# Altium PCB ssd-pcb.PcbDoc
Units mil, origin at the board's own origin, x right, y up, seen from the top; angles counter-clockwise.
Board outline 2510 x 1830 mil, 2 copper layers (Top Layer, Bottom Layer); 8 components, 17 nets, 69 pads, 44 vias.
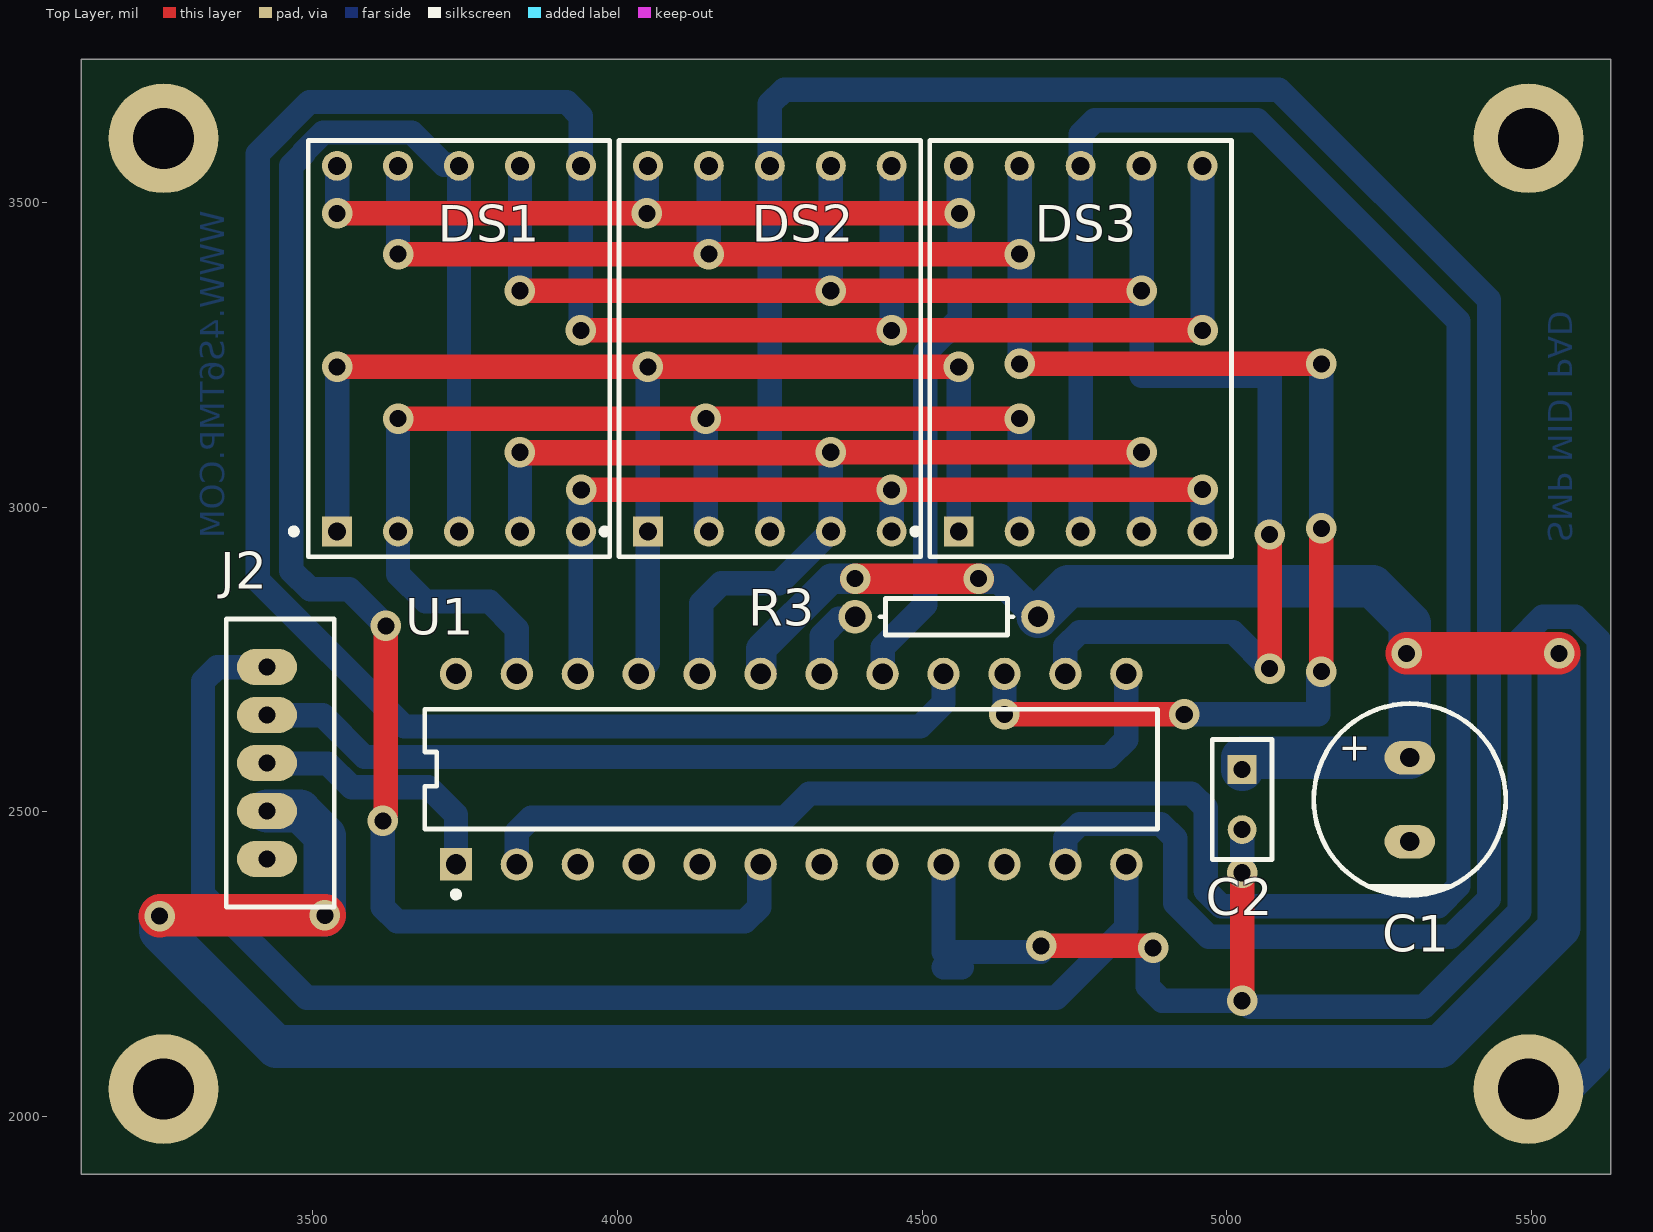
[diagram p0: Top Layer view]
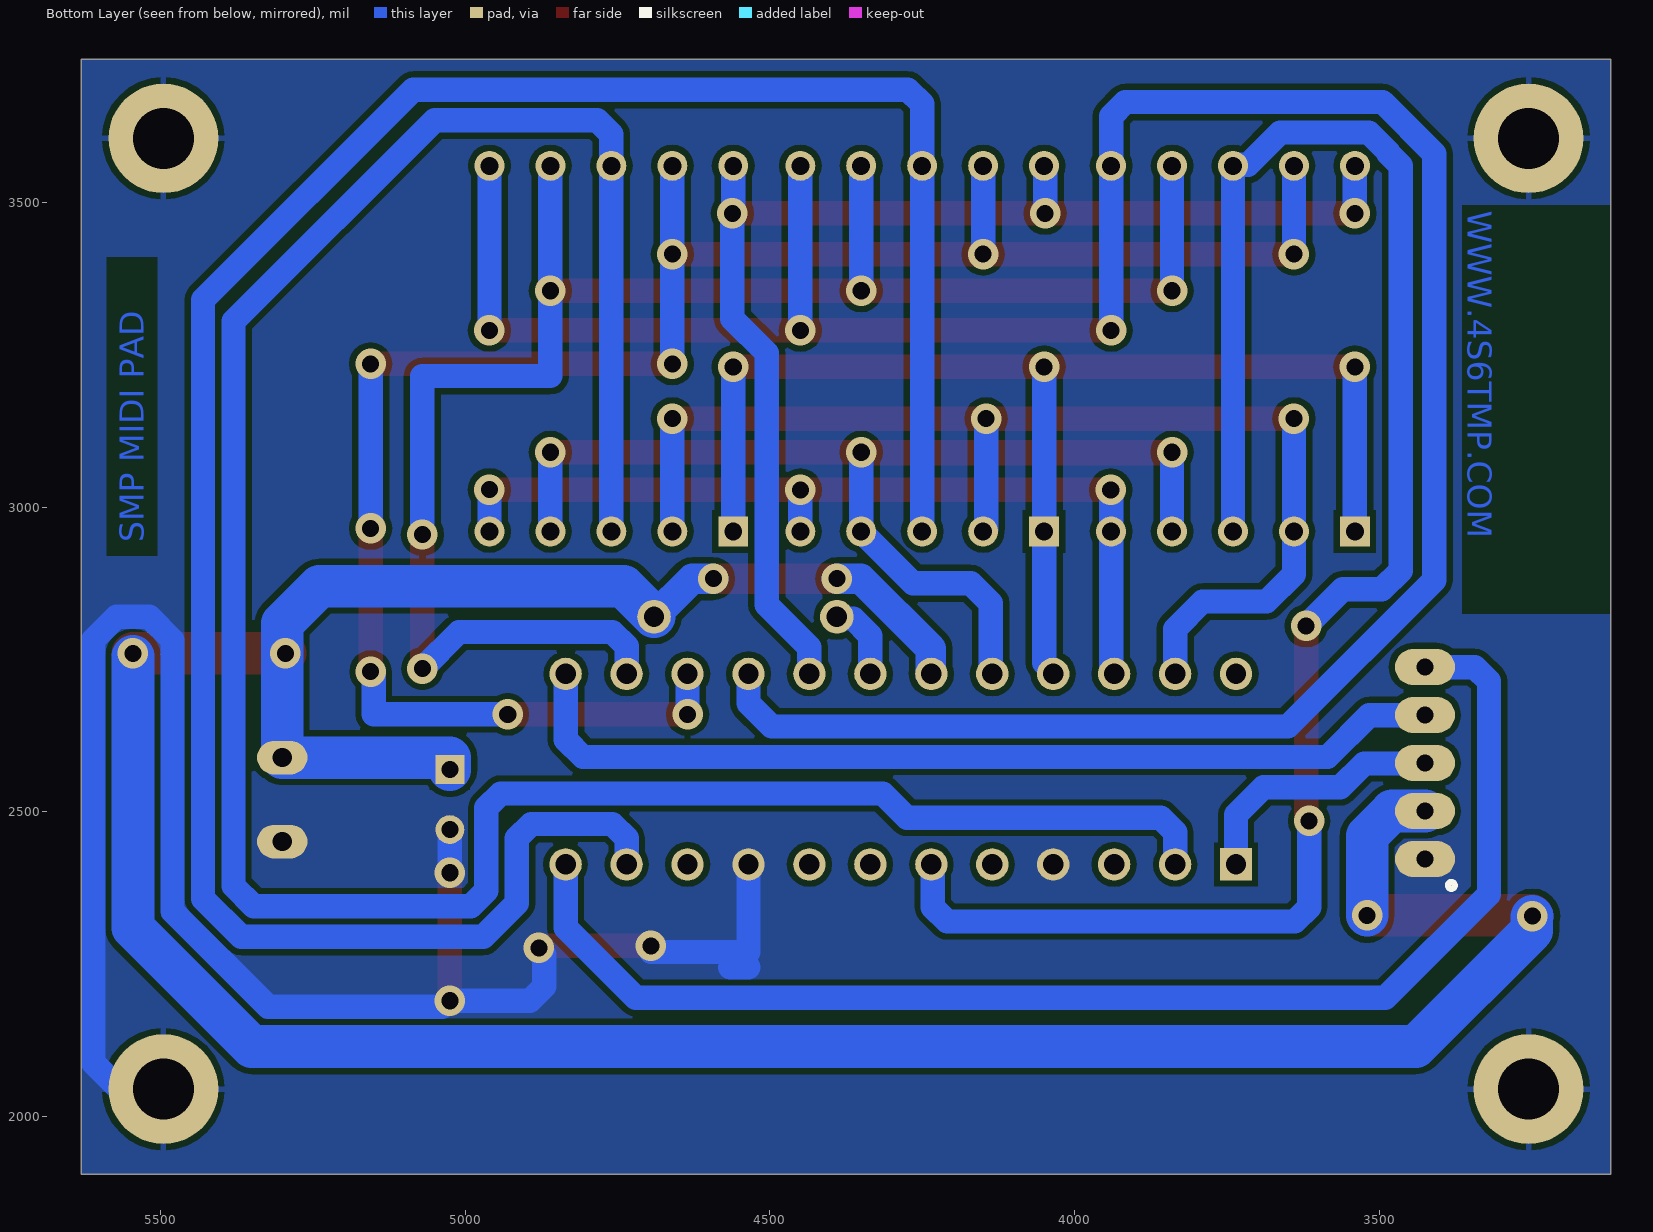
[diagram p1: Bottom Layer view, seen from below]
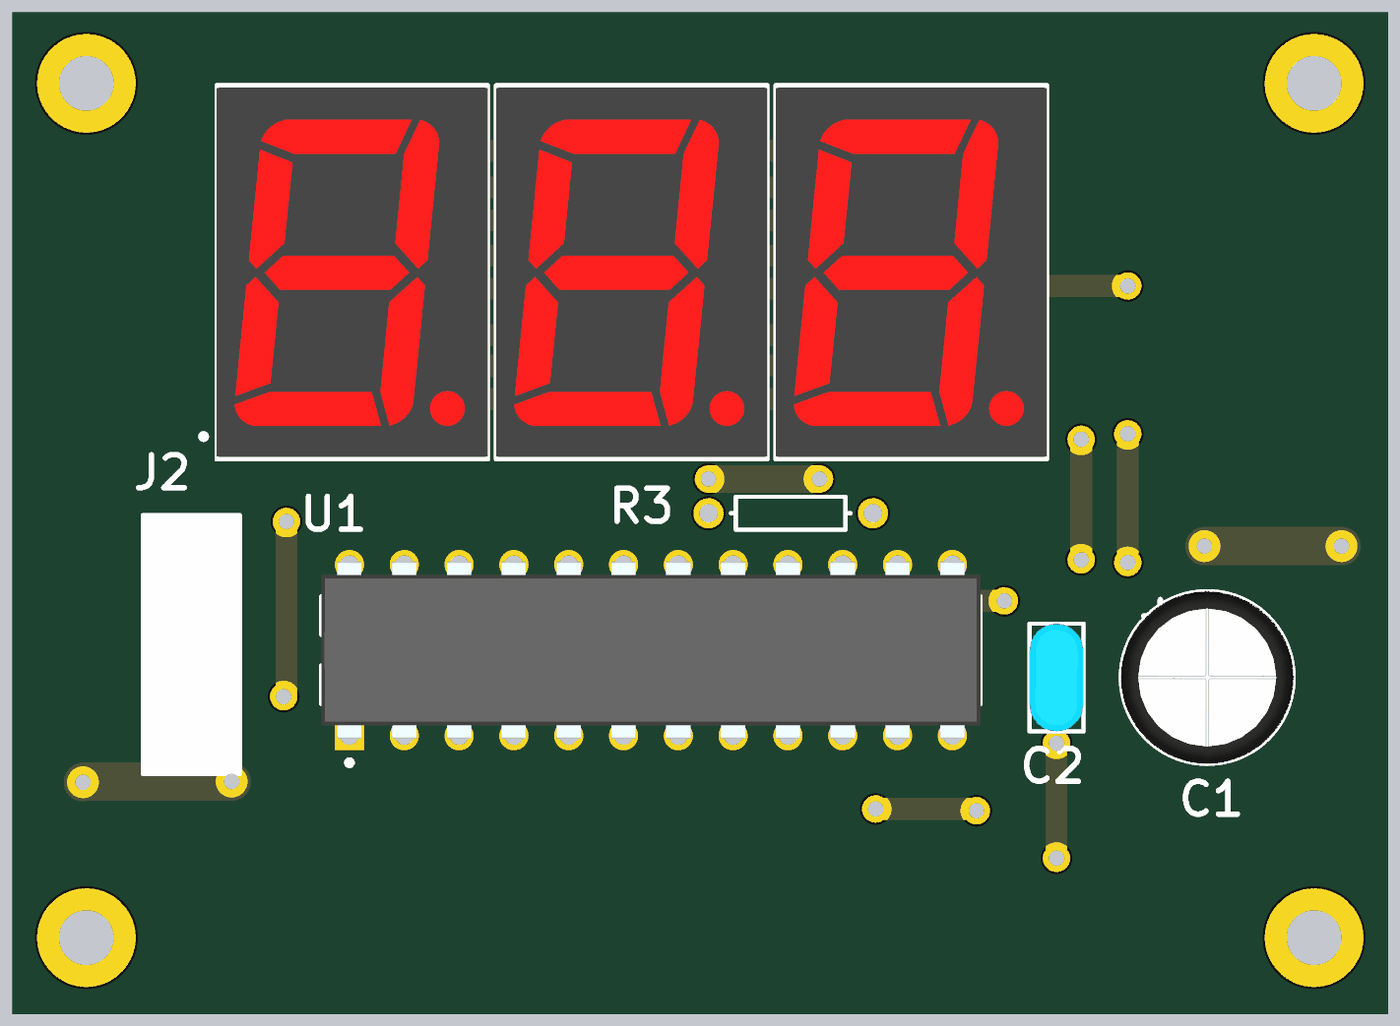
[diagram p2: 3D render of the assembled board from above, using the file's embedded part models]

## Layer stack, top to bottom
Top Solder: solder mask 0.4, Solder Resist, Dk 3.5
Top Layer: signal copper 1.4
Dielectric 1: dielectric 12.6, FR-4, Dk 4.8
Bottom Layer: signal copper 1.4
Bottom Solder: solder mask 0.4, Solder Resist, Dk 3.5

## Board outline
3120,1905 5630,1905 5630,3735 3120,3735

## Design rules (kind name [scope] priority, off if disabled: settings)
Clearance [All] p1: gap=10 ignorepadtopadclearanceinfootprint=FALSE except(0: Arc-Hole Track-Hole SMDPad-Hole THPad-Hole Via-Hole Fill-Hole Poly-Hole Region-Hole Text-Hole)
MinimumSolderMaskSliver [All] p1 off: minsoldermaskwidth=10
PolygonConnect [All] p1: connectstyle=Relief reliefconductorwidth=10 reliefentries=4 polygonreliefangle="90 Angle" airgapwidth=10
RoomDefinition seven-segs [InComponentClass('seven-segs')] p1: confinementstyle=ConfineIn formatcopy=TRUE lockcomponents=FALSE outline 3120,1905 5630,1905 5630,3735 3120,3735
RoutingVias [All] p1: holewidth=28 width=50 viastyle="Through Hole" minholewidth=28 minwidth=50 maxholewidth=28 maxwidth=50
SilkToSolderMaskClearance [IsPad] p1 off: minsilkscreentomaskgap=10 clearancetoexposedcopper=TRUE
SolderMaskExpansion [All] p1: expansion=4 istentingtop=FALSE
Width 5V-width [InNet('5V')] p1: maxlimit=70 minlimit=25 preferedwidth=50 minimp=50.000000 maximp=50.000000 favimp=50.000000
Width [All] p2: maxlimit=80 minlimit=20 preferedwidth=40
28 further rules are at their usual default settings.

## Components (designator, comment, footprint, x,y, rotation, side; value= is the part's Value field where it differs from the comment)
C1 "470µF" "CAP TH ALUM ELEC D8.00mm S3.50mm H12.50mm" 5300,2520 r90 top
C2 "100nF" FP-RDE0P1-MFG 5025,2520 r270 top
DS1 "Digit 3" FP-HDSP-H153-MFG 3740,3260 r0 top
DS2 "Digit 2" FP-HDSP-H153-MFG 4250,3260 r0 top
DS3 "Digit 1" FP-HDSP-H153-MFG 4760,3260 r0 top
J2 "B5B-PH-K-S(LF)(SN)" "JST B5B-PH-K" 3425,2580 r90 top
R3 "10K" AXIAL-0.3 4540,2820 r0 top
U1 "IC_Maxim_Electronics_MAX7219CNG+_eec" Maxim_Electronics_MAX7219CNG+_0 4285,2570 r90 top

## Footprints (in the part's own frame and the unit in brackets; to place one, negate y for a bottom-side part, rotate by r counter-clockwise, add the part's x,y. Pads: shape width x height; smd on the part's side, far side on the other; paste and mask are expansions set on the pad)
AXIAL-0.3 [mm] "Axial Device, Thru-Hole; 2 Leads; 0.3 in Pin Spacing"
  round 1.4 hole 0.85: 1(-3.81,0) 2(3.81,0)
  silkscreen extent -2.77,-0.76 2.77,0.76
"CAP TH ALUM ELEC D8.00mm S3.50mm H12.50mm" [mm] "8mm Diameter 3.5mm Lead Spacing Aluminum Electrolytic Capacitors Radial, Can"
  oval 1.4x2.1 hole 0.8: 1(1.75,0) 2(-1.75,0)
  silkscreen extent -4,-4 4,4, body extent -4.01,-4 4,4, height 12.5
FP-HDSP-H153-MFG [mm]
  rect 1.25x1.25 hole 0.75 paste-1000 mask+0: 1(-5.08,-7.62)
  round 1.25 hole 0.75 paste-1000 mask+0: 2(-2.54,-7.62) 3(0,-7.62) 4(2.54,-7.62) 5(5.08,-7.62) 6(5.08,7.62) 7(2.54,7.62) 8(0,7.62) 9(-2.54,7.62) 10(-5.08,7.62)
  silkscreen extent -7.01,-8.67 6.29,8.67, body extent -6.39,-8.77 6.39,8.77, height 0.25
FP-RDE0P1-MFG [mm]
  rect 1.2x1.2 hole 0.7 paste-1000 mask+0: 1(-1.25,0)
  round 1.2 hole 0.7 paste-1000 mask+0: 2(1.25,0)
  silkscreen extent -2.5,-1.25 2.5,1.25, body extent -2.6,-1.35 2.6,1.35, height 0.25
"JST B5B-PH-K" [mm]
  oval 1.5x2.5 hole 0.7: 1(-4,0) 2(-2,0) 3(0,0) 4(2,0) 5(4,0)
  silkscreen extent -6,-2.8 6,1.7, body extent -5.95,-2.8 5.95,1.7, height 6
Maxim_Electronics_MAX7219CNG+_0 [mm]
  rect 1.35x1.35 hole 0.85 paste-1000 mask+0: 1(-3.97,13.97)
  round 1.35 hole 0.85 paste-1000 mask+0: 2(-3.97,11.43) 3(-3.97,8.89) 4(-3.97,6.35) 5(-3.97,3.81) 6(-3.97,1.27) 7(-3.97,-1.27) 8(-3.97,-3.81) 9(-3.97,-6.35) 10(-3.97,-8.89) 11(-3.97,-11.43) 12(-3.97,-13.97) 13(3.97,-13.97) 14(3.97,-11.43) 15(3.97,-8.89) 16(3.97,-6.35) 17(3.97,-3.81) 18(3.97,-1.27) 19(3.97,1.27) 20(3.97,3.81) 21(3.97,6.35) 22(3.97,8.89) 23(3.97,11.43) 24(3.97,13.97)
  silkscreen extent -5.34,-15.27 2.49,15.27, body extent -4.74,-16.24 4.74,16.24, height 0.25

## Part data
C1: library part UKW1C471MPD1TD, "CAP ALUM 470UF 20% 16V RADIAL", Device Package="Radial, Can", Lifetime @ Temp.="2000 Hrs @ 85°C", Manufacturer=Nichicon, Operating Temperature="-40°C ~ 85°C", Ripple Current @ Low Frequency="420mA @ 120Hz", Supplier Part Number 1=493-10758-1-ND, Tolerance=±20%, Voltage - Rated=16V, Applications=Audio, Capacitance=470µF, ComponentLink1Description=Datasheet, ComponentLink1URL=http://nichicon-us.com/english/products/pdfs/e-ukw.pdf, ComponentLink2Description="DigiKey Link", ComponentLink2URL=http://digikey.com/product-detail/en/nichicon/UKW1C471MPD1TD/493-10758-1-ND/4317734, Height - Seated (Max)="0.492\" (12.50mm)", LastUpdated="07/09/2020 05:24:52", Lead Spacing="0.138\" (3.50mm)", Lifecycle Status=Active, Minimum Order=1, Mounting Type="Through Hole", Package / Case="Radial, Can", Packaging=TapeAndBox, Part Number=UKW1C471MPD1TD, Part Status=Active, PartId=7216, Polarization=Polar, Price=0.14, Series=UKW, Size / Dimension="0.315\" Dia (8.00mm)", Supplier 1=DigiKey
C2: library part CMP-06035-043129-1, "Ceramic Capacitor 100nF ±10% 50V X7R Radial", Case/Package=Radial, Dielectric=X7R, Max Operating Temperature=125°C, Min Operating Temperature=-55°C, Package Quantity=2000, Resistor Type=Ceramic, Tolerance=10%, Voltage Rating=50V, Capacitance=100nF, Height=3.5mm, Height - Seated (Max)=0.236inch, Lead Diameter=0.5mm, Lead Free="Lead Free", Lead Pitch=0.098inch, Lead/Base Style="Formed Leads", Length=0.197inch, Mount="Through Hole", Packaging="Tape and Reel", Termination=Radial, Voltage Rating (DC)=50V, Width=0.098inch
DS1 DS2 DS3: library part CMP-18395-000002-1, "LED 7-SEG 14.2MM CC RED RHD RHD", Forward Current=100mA, Forward Voltage=2V, Manufacturer=Broadcom, Manufacturer Part Number=HDSP-H153, Power Dissipation=96mW, Reverse Voltage=15V, Temperature="-20°C to +100°C", Temperature Range High=+100°C, Temperature Range Low=-20°C, Automotive=No, Category=Disp, ComponentLink2Description=Datasheet, ComponentLink2URL=https://docs.broadcom.com/docs/AV02-1107EN, Device Class L1=Optoelectronics, Device Class L2=Displays, Device Class L3="LED Displays", Digikey Description="LED 7-SEG 14.2MM CC RED RHD RHD", Display Type=LED, Element Config="Common Cathode", Height=8mm, Lead Free=Yes, Luminous Intensity=16mcd, Octopart=https://octopart.com/hdsp-h153-broadcom-71129578, Package=HDSP-H153, RoHS=TRUE, Standoff Height=1.14mm, Test Current=100mA, Viewing Angle=100°, Wavelength=637nm
J2: "CONN HEADER VERT 5POS 2MM", Current Rating (Amps)=2A, Insulation Color=Natural, Manufacturer="JST Sales America Inc.", Material Flammability Rating="UL94 V-0", Operating Temperature="-25°C ~ 85°C", Supplier Part Number 1=455-1707-ND, Voltage Rating=100V, ComponentLink1Description=Datasheet, ComponentLink1URL=http://www.jst-mfg.com/product/pdf/eng/ePH.pdf, ComponentLink2Description="DigiKey Link", ComponentLink2URL=http://digikey.com/product-detail/en/jst-sales-america-inc/B5B-PH-K-S-LF-SN/455-1707-ND/926614, Connector Type=Header, Contact Finish - Mating=Tin, Contact Finish - Post=Tin, Contact Length - Mating="0.130\" (3.30mm)", Contact Length - Post="0.134\" (3.40mm)", Contact Material=Brass, Contact Shape=Square, Contact Type="Male Pin", Fastening Type="Detent Lock", Insulation Height="0.236\" (6.00mm)", Insulation Material="Polyamide (PA66), Nylon 6/6", LastUpdated="12/01/2020 22:30:05", Lifecycle Status=Active, Minimum Order=1, Mounting Type="Through Hole", Number of Positions=5, Number of Positions Loaded=All, Number of Rows=1, Overall Contact Length="0.333\" (8.45mm)", Packaging=Bulk, Part Number=B5B-PH-K-S(LF)(SN), Part Status=Active, PartId=28, Pitch - Mating="0.079\" (2.00mm)", Price=0.29, Series=PH, Shrouding="Shrouded - 4 Wall", Style="Board to Cable/Wire", Supplier 1=DigiKey, System=Connector, Termination="Press-Fit, Solder"
R3: library part Res1, "Resistor", LatestRevisionDate=17-Jul-2002, LatestRevisionNote="Re-released for DXP Platform.", PackageDescription="Axial Device, Thru-Hole; 2 Leads; 0.3 in Pin Spacing", PackageReference=AXIAL-0.3, Published=8-Jun-2000, Publisher="Altium Limited"
U1: "IC DRIVER LED DISPLAY 8DGT 24DIP", Current - Supply=330mA, Digikey Part Number=MAX7219CNG+-ND, Manufacturer="Maxim Electronics", Mouser Part Number=700-MAX7219CNG, Package=DIP24, Part Number=MAX7219CNG+, Temperature="0°C to +70°C", Temperature Range High=+70°C, Temperature Range Low=0°C, Voltage - Supply="4V ~ 5.5V", ComponentLink1Description=Upverter, ComponentLink1URL=https://upverter.com/upn/revision/65c00705c4b1693e/, ComponentLink2Description=Datasheet, ComponentLink2URL=https://datasheets.maximintegrated.com/en/ds/MAX7219-MAX7221.pdf, Configuration="7 Segment + DP", Digikey Description="IC DRIVER LED DISPLAY 8DGT 24DIP", Digits or Characters="8 Digits", helpURL=https://upverter.com/upn/revision/65c00705c4b1693e/, Interface="4-Wire Serial", Ipc Land Pattern Name=DIP794W47P254L3055H457Q24, Lead Free=yes, Price=6.81257539575, RoHS=TRUE, Supplier 1=Digi-Key, Supplier 2=Mouser, Supplier Part Number 1=MAX7219CNG+-ND, Supplier Part Number 2=700-MAX7219CNG

## Free pads (board coordinates)
  round 180 hole 100: 2(5495,3605) 3(3255,3605) 4(3255,2045) 5(5495,2045)

## Via types
v1: diameter 50, hole 28, Top Layer to Bottom Layer, 44 vias

## Nets (pads, with @x,y where several pads share a name; then routed paths per layer and width w, separated by ;. In a path a pad name is that pad's centre, name@x,y a point inside that pad or via, vN(x,y) a via of type N, cw(c..) or ccw(c..) an arc to the next point about the centre after c; other vN are vias at no path point)
5V: C1.1 C2.1 J2.2 R3.2 U1.19 | length 5427.9
  Top Layer w50: v1(4390,2882.56) v1(4592.56,2882.56)
  Top Layer w70: v1(3248.75,2328.75) 3250,2330 v1(3520,2330) ; v1(5295,2760) v1(5545,2760)
  Bottom Layer w50: U1.19 4235.6,2726.9 4235.6,2767.39 4350.77,2882.56 v1(4390,2882.56) ; v1(4592.56,2882.56) 4627.44,2882.56 R3.2
  Bottom Layer w70: v1(3248.75,2328.75) 3250,2327.5 3250,2305 3440,2115 5350,2115 5545,2310 v1@5545,2755 ; J2.2 3478.99,2501.26 3520,2460.25 v1(3520,2330) ; R3.2 4740,2870 5238.99,2870 5300,2808.99 5300,2760 C1.1 5025,2588.9 C2.1
CLK: J2.4 U1.13 | length 1558.1
  Bottom Layer w40: J2.4 3516.26,2658.74 3585,2590 4806.57,2590 4835,2618.43 U1.13
DIG0: DS3.3 DS3.8 U1.2 | length 4138.8
  Bottom Layer w40: U1.2 3835,2466.57 3858.43,2490 4275,2490 4315,2530 4941.57,2530 4965,2506.57 4965,2370.71 4990.71,2345 5346.65,2345 5380,2378.34 5380,3305 5050,3635 4783.43,3635 4760,3611.57 DS3.8 DS3.3
DIG1: DS2.3 DS2.8 U1.11 | length 3929.1
  Bottom Layer w40: DS2.3 DS2.8 4250,3661.57 4273.43,3685 5085,3685 5430,3340 5430,2357.63 5367.37,2295 4970,2295 4915,2350 4915,2456.57 4891.57,2480 4758.43,2480 4735,2456.57 U1.11
DIG2: DS1.3 DS1.8 U1.6 | length 2950.2
  Top Layer w40: v1(3615,2485) 3615,2490 3620,2495 v1(3620,2805)
  Bottom Layer w40: v1(3615,2485) 3615,2343.43 3638.43,2320 4209.05,2320 4232.48,2343.43 4232.48,2411.18 U1.6 ; v1(3620,2805) 3560,2865 3495.71,2865 3465,2895.71 3465,3560 3485.39,3580.39 3485.39,3582.62 3517.38,3614.61 3662.62,3614.61 3715.46,3561.76 3738.24,3561.76 DS1.8 DS1.3
DIN: J2.3 U1.1 | length 426.5
  Bottom Layer w40: J2.3 3425.65,2579.35 3524.94,2579.35 3564.29,2540 3690,2540 3735,2495 U1.1
GND: C1.2 C2.2 J2.1 pad.2 pad.3 pad.4 pad.5 U1.4 U1.9 | length 2997.6
  Top Layer w40: v1(4695,2280) 4875.65,2280 v1(4878.85,2276.8) ; v1(5025,2190) 5025,2394.39 5024.39,2395 5025,2395 v1(5025,2400)
  Bottom Layer w40: 4535,2245 4565,2245 ; U1.9 4535,2270 4695,2270 v1(4695,2280) ; v1(4878.85,2276.8) 4878.85,2274.09 4870,2265.24 4870,2213.43 4893.43,2190 5027.71,2190 5037.71,2180 5323.08,2180 5480,2336.92 5480,2781.92 5518.08,2820 5571.92,2820 5610,2781.92 5610,2088.08 5571.92,2050 pad.5@5495,2050 ; v1(5025,2400) C2.2
LOAD: J2.5 U1.12 | length 2200.5
  Bottom Layer w40: J2.5 3343.43,2737.48 3320,2714.05 3320,2365 3490,2195 4720,2195 4835,2310 U1.12
NetR3_1: R3.1 U1.18 | length 130.5
  Bottom Layer w40: U1.18 4335,2789.01 4363.1,2817.11 4387.11,2817.11 R3.1
SEGA: DS1.7 DS2.7 DS3.7 U1.14 | length 2879.8
  Top Layer w40: v1(3840,3355) v1(4350,3355) v1(4860,3355) ; v1(5070,2735) v1(5070,2955)
  Bottom Layer w40: v1(3840,3355) DS1.7 ; v1(4350,3355) DS2.7 ; U1.14 4735,2771.57 4758.43,2795 5010,2795 v1(5070,2735) ; DS3.7 v1(4860,3355) 4860,3215 5070,3215 v1(5070,2955)
SEGB: DS1.6 DS2.6 DS3.6 U1.16 | length 4471.2
  Top Layer w40: v1(3940,3290) v1(4450,3290) 4952.29,3290 4957.29,3295 v1@4960,3295
  Bottom Layer w40: v1(3940,3290) DS1.6 3940,3641.17 3916.57,3664.61 3494.61,3664.61 3410,3580 3410,2880 3650,2640 4496.57,2640 4535,2678.43 U1.16 ; v1(4450,3290) DS2.6 ; v1@4960,3295 DS3.6
  other v1: 4960,3290
SEGC: DS1.4 DS2.4 DS3.4 U1.20 | length 2286.5
  Top Layer w40: v1(3840,3090) v1(4350,3090) v1(4860,3090) ; v1@3842.71,3088.09 v1@4350.79,3088.09
  Bottom Layer w40: DS1.4 v1@3840,3080 ; U1.20 4137.52,2728.82 4137.52,2842.52 4170.13,2875.13 4265.13,2875.13 DS2.4 v1(4350,3090) ; DS3.4 v1(4860,3090)
SEGD: DS1.2 DS2.2 DS3.2 U1.23 | length 1954
  Top Layer w40: v1(3640,3145) v1(4145,3145) v1(4660,3145)
  Bottom Layer w40: v1(3640,3145) DS1.2 3640,2890 3685,2845 3790,2845 3835,2800 U1.23 ; v1(4145,3145) 4145,2963.4 4148.4,2960 DS2.2 ; DS3.2 v1(4660,3145)
SEGDP: DS1.5 DS2.5 DS3.5 U1.22 | length 1465
  Top Layer w40: v1(3940.63,3028.25) v1@4444.04,3028.25 ; v1@4450,3025 4447.29,3025 v1@4444.04,3028.25 ; v1(4960,3028.65) 4960,3028.25 v1(4450,3028.25) v1@4444.04,3028.25
  Bottom Layer w40: U1.22 3937.52,2728.82 3937.52,2738.11 3940,2740.6 DS1.5 3940,3027.62 v1(3940.63,3028.25) ; DS2.5 v1@4450,3025 ; DS3.5 v1(4960,3028.65)
SEGE: DS1.1 DS2.1 DS3.1 U1.21 | length 2069.9
  Top Layer w40: v1(3540,3230) v1(4050,3230) v1(4560,3230)
  Bottom Layer w40: DS1.1 v1(3540,3230) ; U1.21 4035,2729.86 4050,2744.86 DS2.1 v1(4050,3230) ; DS3.1 v1(4560,3230)
SEGF: DS1.9 DS2.9 DS3.9 U1.15 | length 3297.8
  Top Layer w40: v1@3638.09,3410.38 v1@3642.71,3415 ; v1(3640,3415) v1@3642.71,3415 ; v1(4635,2660) v1(4930,2660) ; v1(4660,3235) v1(5155,3235) ; v1(4660,3415) v1(4150,3415) v1@3642.71,3415 ; v1(5155,2730) v1(5155,2965)
  Bottom Layer w40: v1(3640,3415) DS1.9 ; v1(4150,3415) DS2.9 ; v1(4635,2660) U1.15 ; v1(4660,3235) v1(4660,3415) DS3.9 ; v1(4930,2660) 5150,2660 5150,2730 v1(5155,2730) ; v1(5155,2965) v1(5155,3235)
SEGG: DS1.10 DS2.10 DS3.10 U1.17 | length 2065
  Top Layer w40: v1(3540,3481.88) v1(4048.12,3481.88) v1(4561.35,3481.88)
  Bottom Layer w40: v1(3540,3481.88) DS1.10 ; v1(4048.12,3481.88) 4048.12,3558.12 DS2.10 ; U1.17 4435,2770 4505,2840 4505,3252.78 4561.35,3309.13 v1(4561.35,3481.88) 4560,3483.23 DS3.10
pads on no net: U1.3 U1.5 U1.7 U1.8 U1.10 U1.24

## Polygon pours and split planes (outlines as drawn)
GND on Bottom Layer "Top Layer-No Net" (solid, remove dead copper, pour order 2): 3120,1905 5630,1905 5630,3735 3120,3735

## Other copper
Bottom Layer:
  text "WWW.4S6TMP.COM" at 3355.08,3486.01 h39.37 r90
  text "SMP MIDI PAD" at 5527,2942 h39.37 r270

## Silkscreen, mask and mechanical layers (free items; w line width, h text height)
Mechanical 1:
  lines w12: 3114,1905 ccw(c3120,1905) 3120,1899 ; 3114,1905 ccw(c3120,1905) 3120,1899 ; 3114,1905 3114,3735 ; 3114,3735 cw(c3120,3735) 3120,3741 ; 3114,3735 cw(c3120,3735) 3120,3741 ; 3120,1899 5630,1899 ; 3120,3741 5630,3741 ; 5630,1899 ccw(c5630,1905) 5636,1905 ; 5630,1899 ccw(c5630,1905) 5636,1905 ; 5630,3741 cw(c5630,3735) 5636,3735 ; 5630,3741 cw(c5630,3735) 5636,3735 ; 5636,1905 5636,3735 ; 3126,1911 3126,3729 5624,3729 5624,1911 3126,1911

## Text inside footprints (layer, text, board x,y; h text height)
C1: Top Overlay "+" at 5244.88,2577.09 h78.74 r90